# Altium PCB motordriver.PcbDoc (part 2 of 3)
Units mm, origin at the board's own origin, x right, y up, seen from the top; angles counter-clockwise.
Board outline 134.2 x 59.7 mm, 4 copper layers (Top Layer, Mid-Layer 2, Mid-Layer 1, Bottom Layer); 185 components, 161 nets, 637 pads, 1528 vias.
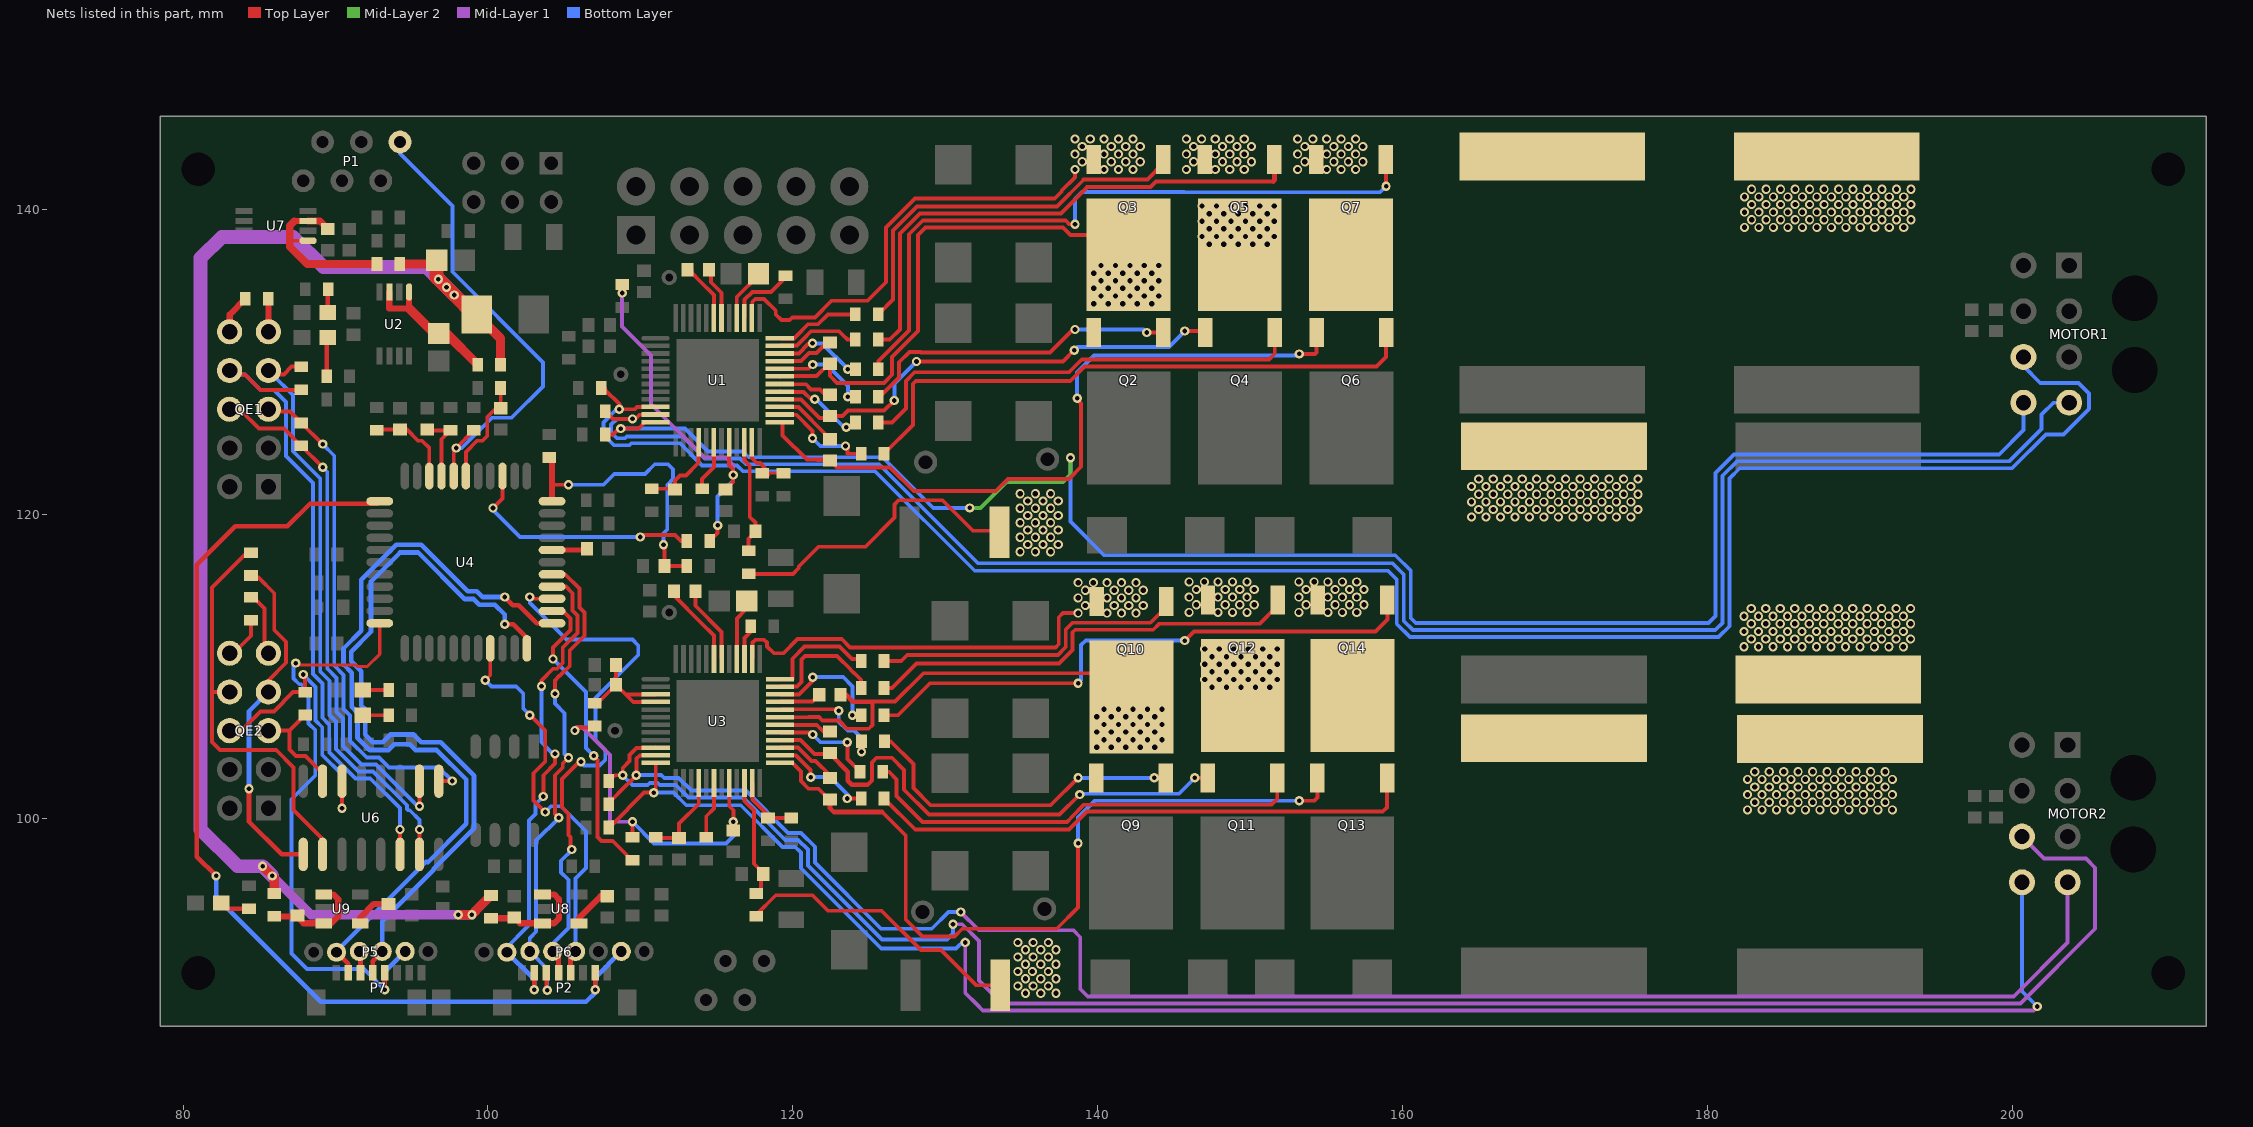
[diagram p4: the nets of this part, all layers, seen from the top]

## Via types
v1: diameter 0.6, hole 0.35, Top Layer to Bottom Layer, tented both sides, 1228 vias
v2: diameter 0.61, hole 0.305, Top Layer to Bottom Layer, tented both sides, 235 vias
v3: diameter 0.66, hole 0.33, Top Layer to Bottom Layer, tented top, 50 vias
v4: diameter 0.813, hole 0.406, Top Layer to Bottom Layer, tented both sides, 6 vias
v5: diameter 0.7, hole 0.4, Top Layer to Bottom Layer, tented both sides, 4 vias
v6: diameter 0.61, hole 0.305, Top Layer to Bottom Layer, 2 vias
v7: diameter 0.7, hole 0.4, Top Layer to Bottom Layer, tented bottom, 2 vias
v8: diameter 0.61/0.61/0.61/0.61 (per signal layer), hole 0.305, Top Layer to Bottom Layer, tented both sides, 1 vias

## Nets (pads, with @x,y where several pads share a name; then routed paths per layer and width w, separated by ;. In a path a pad name is that pad's centre, name@x,y a point inside that pad or via, vN(x,y) a via of type N, cw(c..) or ccw(c..) an arc to the next point about the centre after c; other vN are vias at no path point) (continued)
DR2_V5: C18.2 C19.2 R36.2 U3.3 U3.4 | length 8.2
  Top Layer w0.254: R36.2@107,107.6 107.2,107.6 C18.2@108.4,108.8 ; C19.2@108.4,110.1 C18.2@108.4,108.8 ; 109.1,108.176 U3.3@110.999,108.176 ; U3.4@110.999,107.676 109.524,107.676 C18.2@108.4,108.8
FF_IN: C35.2 R41.1 R42.1 U4.11 | length 19.7
  Top Layer w0.203: U4.11@104.202,120.84 U4.11@104.596,120.84
  Top Layer w0.254: 104.202,121.92 v2(105.283,121.92) ; v2(111.506,117.983) 111.571,117.794 C35.2@111.571,116.586 R42.1@113.042,116.586
  Top Layer w0.406: U4.11@104.202,120.84 104.202,121.92 R41.1@104.202,123.444
  Bottom Layer w0.254: v2(105.283,121.92) 107.569,121.92 108.28,122.631 110.303,122.631 110.938,123.266 111.811,123.266 112.141,122.936 112.141,122.292 111.76,121.911 111.76,118.99 111.506,118.736 111.506,118.237 v2(111.506,117.983)
H1_1: MOTOR1.6 R43.2 U1.10 | length 129.9
  Top Layer w0.254: R43.2@107.569,128.143 107.696,128.143 R43.2@107.684,128.155 ; R43.2@107.569,128.27 R43.2@107.684,128.155 ; R43.2@107.684,128.27 R43.2@107.684,128.155 ; U1.10@110.942,127.048 110.962,127.028 U1.10@110.987,127.028 110.967,127.008 109.779,127.008 109.643,126.873 v2(108.618,126.873) 108.618,127.212 107.684,128.146 R43.2@107.684,128.155
  Bottom Layer w0.254: v2@108.437,126.873 107.569,126.005 107.569,125.201 108.26,124.511 109.271,124.511 109.398,124.638 112.598,124.638 114.046,123.19 116.341,123.19 116.722,122.809 125.391,122.809 131.92,116.28 159.02,116.28 159.6,115.7 159.6,112.8 160.47,111.93 180.704,111.93 181.414,112.64 181.414,122.321 182.093,123 199.947,123 202.17,125.223 203.323,125.223 205,126.9 205,127.9 204.3,128.6 201.8,128.6 200.7,129.7 MOTOR1.6@200.7,130.3
H1_2: MOTOR2.6 R46.2 U3.10 | length 123
  Top Layer w0.254: R46.2@107.926,102.604 R46.2@107.926,102.489 R46.2@107.926,102.731 ; R46.2@107.938,102.616 107.938,102.362 R46.2@107.996,102.42 ; R46.2@107.95,102.489 108.331,102.87 v2(108.839,102.87) 108.839,103.355 109.279,103.794 109.279,104.199 109.736,104.656 110.954,104.656 U3.10@110.974,104.676
  Mid-Layer 1 w0.254: v2@130.489,93.057 v2@130.532,93.1 ; v2(130.5,93.1) v2@130.532,93.1 ; MOTOR2.6@200.6,98.85 202.05,97.4 204.8,97.4 205.4,96.8 205.4,92.8 200.509,87.909 133.691,87.909 132.2,89.4 132.2,92 131.1,93.1 v2@130.532,93.1
  Bottom Layer w0.254: v2(108.839,102.87) 108.839,102.861 109.465,102.235 110.481,102.235 110.608,102.362 111.134,102.362 111.261,102.235 112.312,102.235 113.147,101.4 116.721,101.4 119.493,98.628 120.34,98.628 120.98,97.988 120.98,96.957 125.837,92.1 130.1,92.1 130.489,92.489 v2@130.489,93.057
H2_1: MOTOR1.7 R44.2 U1.11 | length 121
  Top Layer w0.254: R44.2@107.696,126.746 108.204,126.238 v2(109.474,126.238) 109.655,126.238 109.925,126.508 110.967,126.508 U1.11@110.987,126.528 ; U1.11@110.942,126.548 U1.11@110.962,126.528
  Bottom Layer w0.254: v2(109.474,126.238) 108.449,126.238 108.077,125.866 108.077,125.34 108.449,124.968 108.975,124.968 109.102,125.095 112.788,125.095 114.235,123.647 116.53,123.647 116.911,123.266 125.634,123.266 132.13,116.77 159.33,116.77 160.057,116.043 160.057,112.989 160.659,112.387 180.487,112.387 180.957,112.857 180.957,122.511 181.904,123.457 199.757,123.457 201.88,125.58 201.88,126.519 202.662,127.3 MOTOR1.7@203.7,127.3
H2_2: MOTOR2.7 R47.2 U3.11 | length 114
  Top Layer w0.254: R47.2@107.95,100.947 107.95,101.092 109.093,102.235 109.102,102.235 109.728,102.861 v2(109.728,102.87) ; v2@109.744,102.886 109.744,103.963 109.957,104.176 U3.11@110.974,104.176
  Mid-Layer 1 w0.254: v2(131,93.9) 132.2,92.7 138.389,92.7 138.845,92.244 138.845,88.855 139.333,88.367 200.067,88.367 203.6,91.9 MOTOR2.7@203.6,95.85
  Bottom Layer w0.254: v2@109.601,102.87 109.625,102.87 v2@109.65,102.895 ; v2@109.626,102.895 v2@109.65,102.895 ; v2(131,93.9) 130.2,93.9 129.1,92.8 125.784,92.8 121.437,97.146 121.437,98.178 120.53,99.085 119.683,99.085 116.911,101.857 113.336,101.857 112.501,102.692 111.557,102.692 111.354,102.895 v2@109.65,102.895
H3_1: MOTOR1.8 R45.2 U1.12 | length 120.7
  Top Layer w0.254: R45.2@107.938,125.222 108.204,125.222 v2@108.585,125.603 ; v2(108.712,125.603) 109.887,125.603 110.312,126.028 U1.12@110.987,126.028
  Mid-Layer 2 w0.254: v2(131.6,120.4) 132.3,120.4 134,122.1 137.7,122.1 138.2,122.6 v2(138.2,123.7)
  Bottom Layer w0.254: v2(108.712,125.603) 112.926,125.603 114.425,124.104 116.72,124.104 117.101,123.723 125.877,123.723 129.2,120.4 v2(131.6,120.4) ; v2(138.2,123.7) 138.2,119.5 140.4,117.3 159.5,117.3 160.514,116.286 160.514,113.179 160.849,112.845 180.045,112.845 180.5,113.3 180.5,122.7 181.714,123.914 199.114,123.914 200.7,125.5 MOTOR1.8@200.7,127.3
H3_2: MOTOR2.8 R48.2 U3.12 | length 114.6
  Top Layer w0.254: R48.2@107.926,99.698 R48.2@107.926,99.441 R48.2@108.137,99.441 ; R48.2@108.125,99.616 110.236,101.727 v2(110.871,101.727) 110.999,101.855 U3.12@110.999,103.676
  Mid-Layer 1 w0.254: v2@131.3,92.1 131.3,88.6 132.03,87.87 132.448,87.452 201.352,87.452 v2(201.6,87.7)
  Bottom Layer w0.254: v2(110.871,101.727) 112.173,101.727 113,100.9 116.575,100.9 119.304,98.171 120.151,98.171 120.523,97.799 120.523,96.768 125.791,91.5 130.7,91.5 v2@131.3,92.1 ; MOTOR2.8@200.6,95.85 200.6,88.7 v2@201.608,87.692
  other v2: 131.3,91.9
IN_A: QE1.6 R56.1 U6.2 | length 35.1
  Top Layer w0.254: QE1.6@83.058,126.619 83.312,126.873 83.71,126.873 84.98,125.603 86.626,125.603 R56.1@87.757,124.472 v2(89.154,123.075) ; v2(95.504,100.838) U6.2@95.504,102.476
  Bottom Layer w0.254: v2(89.154,123.075) 89.459,122.77 89.459,122.682 89.459,109.871 90.074,109.255 90.074,107.013 ; 90.074,107.203 90.074,107.013 ; v2(95.504,100.838) 95.377,100.838 95.148,101.067 95.148,101.09 92.657,103.581 91.694,103.581 90.5,104.775 90.5,106.587 90.074,107.013
IN_B: QE1.8 R57.1 U6.14 | length 43.1
  Top Layer w0.254: QE1.8@83.058,129.159 84.074,129.159 85.09,128.143 87.745,128.143 R57.1@87.757,128.155 ; U6.14@94.234,97.676 v2(94.234,99.314)
  Bottom Layer w0.254: QE1.8@83.058,129.159 84.074,129.159 85.09,128.143 85.962,128.143 86.753,127.351 86.753,123.813 88.519,122.047 88.519,109.517 89.154,108.882 89.154,106.64 ; 89.154,106.83 89.154,106.64 ; v2(94.234,99.314) 94.234,100.711 92.278,102.667 91.315,102.667 89.586,104.396 89.586,106.209 89.154,106.64
IN_C: QE2.6 R58.1 U6.6 | length 18.8
  Top Layer w0.254: QE2.6@83.058,105.791 83.82,105.791 85.09,107.061 85.962,107.061 87.22,108.319 R58.1@88.011,108.319 88.011,109.347 v2(87.884,109.474) ; v2(90.424,100.711) U6.6@90.424,102.476
  Bottom Layer w0.254: v2(87.884,109.474) 88.697,108.661 88.697,106.451 89.129,106.019 89.129,104.207 90.424,102.911 v2(90.424,100.711)
IN_D: QE2.8 R59.1 U6.10 | length 27.4
  Top Layer w0.254: QE2.8@83.058,108.077 82.804,108.331 81.903,108.331 ; R59.1@84.455,117.336 84.062,117.336 81.903,115.177 81.903,108.331 ; U6.10@89.154,97.676 89.154,98.679 87.249,100.584 87.249,103.378 86.111,104.516 82.428,104.516 81.903,105.041 81.903,108.331
IN_NA: QE1.5 R56.2 U6.1 | length 33.4
  Top Layer w0.254: QE1.5@85.598,126.619 85.713,126.734 87.007,126.734 R56.2@87.763,125.978 ; R56.2@87.757,125.972 89.142,124.587 v2(89.154,124.587) ; U6.1@96.787,102.489 v2(97.663,102.489)
  Bottom Layer w0.254: v2(89.154,124.587) 89.916,123.825 89.916,110.06 90.531,109.445 90.531,107.203 90.957,106.777 90.957,105.127 92.046,104.038 92.846,104.038 93.507,103.378 96.774,103.378 v2(97.663,102.489)
IN_NB: QE1.7 R57.2 U6.15 | length 38.7
  Top Layer w0.254: QE1.7@85.598,129.159 86.614,129.159 87.122,129.667 87.745,129.667 R57.2@87.757,129.655 ; U6.15@95.504,97.676 v2(95.504,99.314)
  Bottom Layer w0.254: QE1.7@85.598,129.159 85.852,129.159 87.21,127.801 87.21,124.118 89.002,122.326 89.002,109.681 89.617,109.066 89.617,106.873 89.611,106.867 89.611,106.83 90.043,106.398 90.043,104.586 91.505,103.124 92.468,103.124 94.691,100.9 94.691,100.635 94.751,100.575 94.869,100.575 95.504,99.94 v2(95.504,99.314)
IN_NC: QE2.5 R58.2 U6.7 | length 7.4
  Top Layer w0.254: QE2.5@85.598,105.791 86.983,105.791 ; R58.2@88.011,106.819 86.983,105.791 ; U6.7@89.154,102.476 89.154,102.997 88.029,104.122 87.409,104.122 86.983,104.548 86.983,105.791
IN_ND: QE2.7 R59.2 U6.9 | length 23
  Top Layer w0.254: R59.2@84.455,115.836 84.951,115.836 85.979,114.808 85.979,112.395 86.753,111.621 86.753,110.248 85.598,109.093 QE2.7@85.598,108.077
  Top Layer w0.305: v2(84.328,101.981) 84.328,99.822 86.474,97.676 U6.9@87.884,97.676
  Bottom Layer w0.305: v2(84.328,101.981) 84.328,107.061 QE2.7@85.598,108.331
M\C\L\R\: P1.1 R29.1 U4.18 | length 30.8
  Top Layer w0.254: U4.18@97.752,122.49 v2@97.752,124.168 ; v2(97.917,124.333) R29.1@99.06,125.488
  Bottom Layer w0.254: P1.1@94.234,144.653 94.234,143.637 97.536,140.335 97.545,140.335 97.663,140.217 97.663,135.89 103.607,129.946 103.607,128.372 101.549,126.314 100.268,126.314 99.125,125.171 99.116,125.171 98.277,124.333 v2(97.917,124.333)
NetC1_1: C1.1 U1.42 | length 3.3
  Top Layer w0.254: C1.1@114.619,135.89 114.619,135.202 115.312,134.509 U1.42@115.312,132.878
NetC1_2: C1.2 U1.43 | length 3.9
  Top Layer w0.254: C1.2@113.219,136.144 113.346,136.017 113.346,135.828 113.919,135.255 114.812,134.362 U1.43@114.812,132.878
NetC2_1: C2.1 U1.40 | length 3.8
  Top Layer w0.254: U1.40@116.312,132.878 116.312,134.231 117.794,135.713 C2.1@117.794,136.017
NetC5_1: C5.1 U1.33 | length 4.4
  Top Layer w0.203: C5.1@122.62,131.256 C5.1@122.682,131.256
  Top Layer w0.254: U1.33@118.9,130.028 120.534,130.028 121.062,130.556 121.548,130.556 122.231,131.239 C5.1@122.665,131.239 ; C5.1@122.682,131.173 C5.1@122.682,131.256
NetC5_2: C5.2 L1.1 Q2.3 Q3.4 U1.31 | length 33.5
  Top Layer w0.254: U1.31@119.162,129.028 119.182,129.048 121.555,129.048 C5.2@122.428,129.921 ; C5.2@122.428,129.856 122.428,129.072 122.9,128.6 125.967,128.6 126.498,129.131 126.498,130.298 128.2,132 128.2,138.3 128.7,138.8 137.7,138.8 138.2,138.3 140.7,138.3 Q3.4@142,137
  Top Layer w0.305: C5.2@122.428,129.921 C5.2@122.428,129.928
  other v1: 164.5,119.8 165.45,119.8 166.4,119.8 167.35,119.8 168.3,119.8 169.25,119.8 170.2,119.8 171.15,119.8 172.1,119.8 173.05,119.8 174,119.8 174.95,119.8 164.975,120.3 165.925,120.3 166.875,120.3 167.825,120.3 168.775,120.3 169.725,120.3 170.675,120.3 171.625,120.3 172.575,120.3 173.525,120.3 174.475,120.3 175.425,120.3 164.5,120.8 165.45,120.8 166.4,120.8 167.35,120.8 168.3,120.8 169.25,120.8 170.2,120.8 171.15,120.8 172.1,120.8 173.05,120.8 174,120.8 174.95,120.8 164.975,121.3 165.925,121.3 166.875,121.3 167.825,121.3 168.775,121.3 169.725,121.3 170.675,121.3 171.625,121.3 172.575,121.3 173.525,121.3 174.475,121.3 175.425,121.3 164.5,121.8 165.45,121.8 166.4,121.8 167.35,121.8 168.3,121.8 169.25,121.8 170.2,121.8 171.15,121.8 172.1,121.8 173.05,121.8 174,121.8 174.95,121.8 164.975,122.3 165.925,122.3 166.875,122.3 167.825,122.3 168.775,122.3 169.725,122.3 170.675,122.3 171.625,122.3 172.575,122.3 173.525,122.3 174.475,122.3 175.425,122.3 139.725,133.8 140.675,133.8 141.625,133.8 142.575,133.8 143.525,133.8 140.2,134.3 141.15,134.3 142.1,134.3 143.05,134.3 144,134.3 139.725,134.8 140.675,134.8 141.625,134.8 142.575,134.8 143.525,134.8 140.2,135.3 141.15,135.3 142.1,135.3 143.05,135.3 144,135.3 139.725,135.8 140.675,135.8 141.625,135.8 142.575,135.8 143.525,135.8 140.2,136.3 141.15,136.3 142.1,136.3 143.05,136.3 144,136.3
NetC6_1: C6.1 U1.30 | length 4.2
  Top Layer w0.203: C6.1@122.512,127.784 C6.1@122.682,127.954
  Top Layer w0.254: U1.30@119.182,128.548 119.162,128.528 119.182,128.508 120.847,128.508 121.192,128.163 121.773,128.163 122.289,127.647 122.62,127.647 C6.1@122.62,127.762
NetC6_2: C6.2 L2.1 Q4.3 Q5.4 U1.28 | length 31.5
  Top Layer w0.254: U1.28@119.182,127.508 120.523,127.508 121.731,126.3 C6.2@122.62,126.3 ; C6.2@122.428,126.427 123.26,126.427 123.613,126.78 125.98,126.78 v2(126.65,127.45) ; v2(128.1,130) 137.7,130 v2(138.45,130.75) ; v2(145.7,132) 146.94,132 Q4.3@147.04,131.9
  Bottom Layer w0.254: v2(126.65,127.45) 126.65,128.55 v2(128.1,130) ; v2(138.45,130.75) 138.657,130.957 144.657,130.957 v2(145.7,132)
  other v1: 147.3,137.7 148.25,137.7 149.2,137.7 150.15,137.7 151.1,137.7 146.825,138.2 147.775,138.2 148.725,138.2 149.675,138.2 150.625,138.2 151.575,138.2 147.3,138.7 148.25,138.7 149.2,138.7 150.15,138.7 151.1,138.7 182.4,138.8 183.35,138.8 184.3,138.8 185.25,138.8 186.2,138.8 187.15,138.8 188.1,138.8 189.05,138.8 190,138.8 190.95,138.8 191.9,138.8 192.85,138.8 146.825,139.2 147.775,139.2 148.725,139.2 149.675,139.2 150.625,139.2 151.575,139.2 182.875,139.3 183.825,139.3 184.775,139.3 185.725,139.3 186.675,139.3 187.625,139.3 188.575,139.3 189.525,139.3 190.475,139.3 191.425,139.3 192.375,139.3 193.325,139.3 147.3,139.7 148.25,139.7 149.2,139.7 150.15,139.7 151.1,139.7 182.4,139.8 183.35,139.8 184.3,139.8 185.25,139.8 186.2,139.8 187.15,139.8 188.1,139.8 189.05,139.8 190,139.8 190.95,139.8 191.9,139.8 192.85,139.8 146.825,140.2 147.775,140.2 148.725,140.2 149.675,140.2 150.625,140.2 151.575,140.2 182.875,140.3 183.825,140.3 184.775,140.3 185.725,140.3 186.675,140.3 187.625,140.3 188.575,140.3 189.525,140.3 190.475,140.3 191.425,140.3 192.375,140.3 193.325,140.3 182.4,140.8 183.35,140.8 184.3,140.8 185.25,140.8 186.2,140.8 187.15,140.8 188.1,140.8 189.05,140.8 190,140.8 190.95,140.8 191.9,140.8 192.85,140.8 182.875,141.3 183.825,141.3 184.775,141.3 185.725,141.3 186.675,141.3 187.625,141.3 188.575,141.3 189.525,141.3 190.475,141.3 191.425,141.3 192.375,141.3 193.325,141.3
NetC8_1: C8.1 U1.27 | length 4.3
  Top Layer w0.254: U1.27@119.162,127.028 119.182,127.008 120.367,127.008 122.174,125.201 C8.1@122.174,124.652
NetC8_2: C8.2 L3.1 Q6.3 Q7.4 U1.25 | length 46.7
  Top Layer w0.254: U1.25@119.137,126.028 119.326,126.028 119.326,125.16 120.916,123.571 121.613,123.571 ; C8.2@122.363,123.571 C8.2@122.428,123.506 122.871,123.063 126.363,123.063 127.926,121.5 133.3,121.5 134.1,122.3 138.1,122.3 138.9,123.1 138.9,127.24 v2@138.64,127.5 ; v2@153.14,130.4 153.24,130.5 154.24,130.5 154.34,130.6 Q6.3@154.34,131.9
  Top Layer w0.305: 121.613,123.571 C8.2@122.363,123.571
  Bottom Layer w0.254: v2(138.64,127.6) 138.64,129.3 139.74,130.4 153.1,130.4 v2(153.2,130.5)
NetC11_2: C11.2 R11.2 U1.16 | length 5.5
  Top Layer w0.254: R11.2@110.744,121.654 112.218,121.654 C11.2@112.268,121.604 112.268,122.197 112.604,122.533 112.978,122.533 113.707,123.262 113.707,123.264 113.812,123.369 U1.16@113.812,124.678
NetC12_2: C12.2 R14.2 R34.1 U1.20 | length 24.5
  Top Layer w0.254: R14.2@114.554,118.237 115.062,118.745 v2(115.062,119.253) ; U1.20@115.812,124.703 115.812,123.202 116.078,122.936 v2(116.078,122.555) 116.078,122.112 C12.2@115.57,121.604 C12.2@115.824,121.858
  Mid-Layer 1 w0.254: v2(108.8,134.5) 108.8,132.3 110.7,130.4 110.7,127.2 114.2,123.7 115.6,123.7 116.078,123.222 v2(116.078,122.555)
  Bottom Layer w0.254: v2(115.062,119.253) 115.062,121.158 116.078,122.174 v2(116.078,122.555)
NetC14_2: C14.2 D1.K F1.1 F2.1 F6.1 F7.1 | length 92.4
  Top Layer w0.61: v2(85.217,96.901) 85.979,96.139 F7.1@85.979,95.111 ; F2.1@94.222,136.398 96.382,136.398 C14.2@96.636,136.652 ; v2(98.044,93.726) v2(98.945,93.726) 99.245,94.026 99.245,94.044 100.185,94.984 F6.1@100.203,94.984 ; D1.K@99.247,133.096 100.826,131.517 F1.1@100.826,129.794
  Top Layer w0.914: C14.2@96.636,136.652 96.636,135.52 v2(96.75,135.406) v2(97.282,134.874) v2(97.79,134.366) 99.06,133.096 D1.K@99.247,133.096
  Mid-Layer 1 w0.61: v2(85.852,96.266) 88.392,93.726 v2(98.945,93.726)
  Mid-Layer 1 w0.914: v2(85.852,96.266) v2(85.217,96.901) 83.566,96.901 81.153,99.314 81.153,136.779 82.55,138.176 87.224,138.176 89.2,136.2 95.956,136.2 v2(96.75,135.406) v2(97.282,134.874) v2(97.79,134.366)
NetC15_2: C15.2 F1.2 U2.1 U2.3 | length 9.5
  Top Layer w0.406: U2.3@93.528,134.561 93.528,133.477 94.828,133.477 U2.1@94.828,134.561
  Top Layer w0.61: 94.828,133.477 96.468,131.837 C15.2@96.774,131.837 97.283,131.837 F1.2@99.326,129.794
NetC16_1: C16.1 U3.42 | length 5.1
  Top Layer w0.254: C16.1@113.603,114.935 113.603,113.981 115.324,112.26 115.324,110.526 U3.42@115.31,110.54
NetC16_2: C16.2 U3.43 | length 5.2
  Top Layer w0.254: C16.2@112.203,114.646 113.979,112.87 113.979,112.866 114.824,112.022 U3.43@114.824,110.526
NetC17_1: C17.1 U3.40 | length 3.9
  Top Layer w0.254: U3.40@116.324,110.526 116.324,113.149 116.87,113.695 C17.1@116.87,114.22
NetC20_1: C20.1 U3.33 | length 2.7
  Top Layer w0.254: U3.33@119.194,107.696 121.285,107.696 C20.1@121.728,108.139
NetC20_2: C20.2 L4.1 Q9.3 Q10.4 U3.31 | length 28.4
  Top Layer w0.254: U3.31@119.174,106.676 121.039,106.676 121.043,106.68 121.699,106.68 121.919,106.459 123.015,106.459 123.556,105.918 124.968,105.918 125.222,106.172 125.222,107.398 125.222,107.569 125.095,107.696 126.696,107.696 128.56,109.56 140.54,109.56 Q10.4@142.2,107.9
  Top Layer w0.305: C20.2@123.488,108.139 123.931,107.696 125.095,107.696
  other v1: 182.6,100.6 183.55,100.6 184.5,100.6 185.45,100.6 186.4,100.6 187.35,100.6 188.3,100.6 189.25,100.6 190.2,100.6 191.15,100.6 192.1,100.6 183.075,101.1 184.025,101.1 184.975,101.1 185.925,101.1 186.875,101.1 187.825,101.1 188.775,101.1 189.725,101.1 190.675,101.1 191.625,101.1 182.6,101.6 183.55,101.6 184.5,101.6 185.45,101.6 186.4,101.6 187.35,101.6 188.3,101.6 189.25,101.6 190.2,101.6 191.15,101.6 192.1,101.6 183.075,102.1 184.025,102.1 184.975,102.1 185.925,102.1 186.875,102.1 187.825,102.1 188.775,102.1 189.725,102.1 190.675,102.1 191.625,102.1 182.6,102.6 183.55,102.6 184.5,102.6 185.45,102.6 186.4,102.6 187.35,102.6 188.3,102.6 189.25,102.6 190.2,102.6 191.15,102.6 192.1,102.6 183.075,103.1 184.025,103.1 184.975,103.1 185.925,103.1 186.875,103.1 187.825,103.1 188.775,103.1 189.725,103.1 190.675,103.1 191.625,103.1 139.925,104.7 140.875,104.7 141.825,104.7 142.775,104.7 143.725,104.7 140.4,105.2 141.35,105.2 142.3,105.2 143.25,105.2 144.2,105.2 139.925,105.7 140.875,105.7 141.825,105.7 142.775,105.7 143.725,105.7 140.4,106.2 141.35,106.2 142.3,106.2 143.25,106.2 144.2,106.2 139.925,106.7 140.875,106.7 141.825,106.7 142.775,106.7 143.725,106.7 140.4,107.2 141.35,107.2 142.3,107.2 143.25,107.2 144.2,107.2
NetC21_1: C21.1 U3.30 | length 3.5
  Top Layer w0.254: U3.30@119.153,106.172 121.56,106.172 122.003,105.729 C21.1@122.428,105.729
NetC21_2: C21.2 L5.1 Q11.3 Q12.4 U3.28 | length 34.2
  Top Layer w0.254: U3.28@119.174,105.176 120.503,105.176 121.412,104.267 122.366,104.267 C21.2@122.428,104.329 ; 124.886,102.235 125.178,102.527 125.178,103.715 125.476,104.013 126.492,104.013 127.283,103.222 127.283,101.917 128.917,100.283 137.483,100.283 v2@138.712,101.512 ; v2(146.352,102.7) Q11.3@147.2,102.7
  Top Layer w0.305: C21.2@122.428,104.267 123.6,103.095 123.6,102.5 123.865,102.235 124.886,102.235
  Bottom Layer w0.254: v2(138.8,101.6) 138.857,101.657 145.309,101.657 v2(146.352,102.7)
  other v1: 147.48,108.65 148.43,108.65 149.38,108.65 150.33,108.65 151.28,108.65 147.005,109.15 147.955,109.15 148.905,109.15 149.855,109.15 150.805,109.15 151.755,109.15 147.48,109.65 148.43,109.65 149.38,109.65 150.33,109.65 151.28,109.65 147.005,110.15 147.955,110.15 148.905,110.15 149.855,110.15 150.805,110.15 151.755,110.15 147.48,110.65 148.43,110.65 149.38,110.65 150.33,110.65 151.28,110.65 147.005,111.15 147.955,111.15 148.905,111.15 149.855,111.15 150.805,111.15 151.755,111.15 182.375,111.3 183.325,111.3 184.275,111.3 185.225,111.3 186.175,111.3 187.125,111.3 188.075,111.3 189.025,111.3 189.975,111.3 190.925,111.3 191.875,111.3 192.825,111.3 182.85,111.8 183.8,111.8 184.75,111.8 185.7,111.8 186.65,111.8 187.6,111.8 188.55,111.8 189.5,111.8 190.45,111.8 191.4,111.8 192.35,111.8 193.3,111.8 182.375,112.3 183.325,112.3 184.275,112.3 185.225,112.3 186.175,112.3 187.125,112.3 188.075,112.3 189.025,112.3 189.975,112.3 190.925,112.3 191.875,112.3 192.825,112.3 182.85,112.8 183.8,112.8 184.75,112.8 185.7,112.8 186.65,112.8 187.6,112.8 188.55,112.8 189.5,112.8 190.45,112.8 191.4,112.8 192.35,112.8 193.3,112.8 182.375,113.3 183.325,113.3 184.275,113.3 185.225,113.3 186.175,113.3 187.125,113.3 188.075,113.3 189.025,113.3 189.975,113.3 190.925,113.3 191.875,113.3 192.825,113.3 182.85,113.8 183.8,113.8 184.75,113.8 185.7,113.8 186.65,113.8 187.6,113.8 188.55,113.8 189.5,113.8 190.45,113.8 191.4,113.8 192.35,113.8 193.3,113.8
NetC23_1: C23.1 U3.27 | length 4.2
  Top Layer w0.254: U3.27@119.174,104.676 120.338,104.676 120.98,104.033 120.999,104.033 121.223,103.81 121.488,103.81 122.428,102.87 C23.1@122.428,102.681
NetC23_2: C23.2 L6.1 Q13.3 Q14.4 U3.25 | length 52.2
  Top Layer w0.254: U3.25@119.174,103.676 119.971,103.676 120.523,103.124 120.523,102.48 121.022,101.981 121.666,101.981 C23.2@122.428,101.219 ; 125.857,100.457 127.4,98.914 127.4,93.4 128.5,92.3 130.6,92.3 131.1,92.8 137.3,92.8 138.7,94.2 138.7,98.3 v2@138.6,98.4 ; v2(153.2,101.2) 154.2,101.2 154.4,101.4 Q13.3@154.4,102.7
  Top Layer w0.305: C23.2@122.428,101.219 122.428,100.711 122.682,100.457 125.857,100.457
  Bottom Layer w0.254: v2(138.7,98.4) 138.7,100.1 139.8,101.2 v2@153,101.2
NetC26_2: C26.2 R25.2 U3.16 | length 5.6
  Top Layer w0.254: R25.2@111.06,98.744 C26.2@112.534,98.744 112.534,99.695 113.824,100.985 U3.16@113.824,102.326
NetC27_2: C27.2 R28.2 R36.1 U3.20 | length 23
  Top Layer w0.254: v2(105.7,105.8) 105.7,105.9 105.8,106 106.9,106 R36.1@107,106.1 ; R28.2@109.474,98.794 v2(109.474,99.822) ; U3.20@115.824,102.326 115.824,100.838 116.09,100.572 v2(116.09,99.822) C27.2@116.084,99.314
  Mid-Layer 1 w0.254: v2(105.7,105.8) 105.7,105.9 105.8,106 106.2,106 108,104.2 108,99.822 v2(109.474,99.822)
  Bottom Layer w0.254: v2(109.474,99.822) 110.896,98.4 115.6,98.4 116.09,98.89 v2(116.09,99.822)
NetC28_2: C28.2 U4.7 | length 2.4
  Top Layer w0.305: U4.7@104.202,117.64 106.488,117.64 C28.2@106.488,117.729
NetC33_2: C33.2 F4.2 U4.17 | length 7
  Top Layer w0.254: U4.17@98.611,122.549 U4.17@98.552,122.49 98.552,124.079 99.281,124.808 99.647,124.808 99.949,125.11 99.949,126.365 100.838,127.254 F4.2@100.838,128.27
NetC38_2: C38.2 R30.1 U4.19 | length 4.8
  Top Layer w0.254: C38.2@96.012,125.488 96.774,125.488 R30.1@97.536,125.488 96.952,124.904 U4.19@96.952,122.49
NetC39_2: C39.2 R49.1 U4.20 | length 5.5
  Top Layer w0.254: R49.1@92.71,125.488 92.76,125.538 93.472,125.538 C39.2@94.234,125.538 ; C39.2@94.488,125.538 94.68,125.538 95.41,124.808 95.664,124.808 96.152,124.32 U4.20@96.152,122.49
NetC44_2: C44.2 F2.2 U7.1 U7.3 | length 11.6
  Top Layer w0.25: 86.995,137.9 87.02,137.925 U7.1@88.2,137.925
  Top Layer w0.4: 87.3,139.2 87.325,139.225 U7.3@88.2,139.225
  Top Layer w0.45: U7.3@88.2,139.222 88.978,139.222 C44.2@89.5,138.7
  Top Layer w0.5: 87.3,139.2 86.995,138.895 86.995,137.9 86.995,137.541 88.138,136.398 F2.2@92.722,136.398
NetC45_2: C45.2 R12.1 U1.22 | length 7.7
  Top Layer w0.254: U1.22@116.812,124.703 116.812,123.514 117.17,123.156 117.17,119.812 117.54,119.442 117.54,118.81 117.094,118.364 R12.1@117.094,117.463
NetC46_2: C46.2 R26.1 U3.22 | length 8
  Top Layer w0.254: U3.22@116.824,102.351 116.824,101.162 117.436,100.55 117.436,97.067 118.079,96.424 117.915,96.26 117.915,95.424 R26.1@117.602,95.111
NetC47_2: C47.2 F6.2 U8.1 U8.3 | length 7.2
  Top Layer w0.406: F6.2@100.203,93.484 C47.2@101.677,93.484 ; C47.2@101.727,93.534 102.104,93.157 U8.3@103.575,93.157 104.333,93.157 104.648,93.472 104.648,94.742 104.333,95.057 U8.1@103.575,95.057
NetC49_2: C49.2 U8.4 | length 2.8
  Top Layer w0.406: U8.4@105.975,93.157 105.975,93.529 107.38,94.934 C49.2@107.823,94.934
NetC50_2: C50.2 F7.2 U9.1 U9.3 | length 6.8
  Top Layer w0.406: F7.2@85.979,93.611 87.453,93.611 87.907,93.157 89.724,93.157 90.18,93.614 90.18,94.732 89.855,95.057 U9.1@89.224,95.057
NetC52_2: C52.2 U9.4 | length 2.6
  Top Layer w0.406: U9.4@91.624,93.157 91.624,93.529 92.521,94.426 C52.2@93.472,94.426
NetD2_1: D2.1 R65.1 | length 1.5
  Top Layer w0.305: D2.1@89.496,133.223 89.496,134.72 R65.1@89.523,134.747
NetD3_1: D3.1 R66.1 | length 2.6
  Top Layer w0.305: R66.1@89.42,129.032 89.42,131.496 D3.1@89.496,131.572
NetD4_1: D4.1 R37.2 | length 1.7
  Top Layer w0.254: D4.1@91.782,108.458 R37.2@93.484,108.458
NetD5_1: D5.1 R38.2 | length 1.7
  Top Layer w0.254: D5.1@91.782,106.807 R38.2@93.484,106.807
NetD6_1: D6.1 R63.1 | length 2
  Top Layer w0.305: D6.1@82.511,94.488 82.88,94.119 R63.1@84.328,94.119
NetP2_2: P2.2 P6.2 U4.4 | length 32.4
  Top Layer w0.254: v2(103.505,108.712) 103.505,109.093 104.267,109.855 104.53,109.855 104.902,110.227 104.902,111.24 105.867,112.206 105.867,113.346 105.537,113.677 105.537,114.808 105.105,115.24 U4.4@104.202,115.24 ; v2(103.632,101.473) 103.632,102.87 104.394,103.632 v2(104.394,104.267)
  Top Layer w0.305: v2(103.029,88.805) P2.2@103.029,89.789
  Bottom Layer w0.254: P6.2@101.079,91.427 102.692,93.04 102.692,99.889 103.124,100.321 103.124,100.965 v2(103.632,101.473) ; v2(103.505,108.712) 103.505,105.029 104.267,104.267 v2(104.394,104.267)
  Bottom Layer w0.305: P6.2@101.079,91.427 103.029,89.477 v2(103.029,88.805)
NetP2_3: P2.3 P6.3 U4.5 | length 33.5
  Top Layer w0.254: P2.3@103.829,89.916 103.829,88.83 v2(103.886,88.773) ; v2(104.394,108.204) 104.394,109.093 104.699,109.398 ; v2(104.648,100.076) 104.394,100.33 104.394,102.87 104.902,103.378 104.902,103.632 v2(105.283,104.013) ; 104.719,109.398 105.359,110.038 105.359,111.051 106.324,112.016 106.324,113.536 105.994,113.866 105.994,115.113 105.067,116.04 U4.5@104.202,116.04 U4.5@104.94,116.04
  Top Layer w0.305: P6.3@102.743,91.313 P6.3@102.758,91.313
  Bottom Layer w0.254: v2(103.886,88.773) 103.886,90.17 P6.3@102.743,91.313 102.743,92.202 103.149,92.608 103.149,98.577 v2(104.648,100.076) ; v2(104.394,108.204) 104.394,107.569 105.029,106.934 105.029,104.267 v2(105.283,104.013)
NetP2_4: P2.4 P6.4 U4.3 | length 36.8
  Top Layer w0.254: v2(102.743,114.554) 102.857,114.44 U4.3@104.202,114.44 ; v2@105.41,98 105.41,98.806 105.283,98.933 105.283,100.339 104.851,100.771 104.851,102.616 106.045,103.81 v2(106.096,103.759)
  Top Layer w0.305: P6.4@104.243,91.313 104.629,90.927 P2.4@104.629,89.916
  Bottom Layer w0.254: v2(102.743,114.554) 102.743,114.173 105.156,111.76 109.483,111.76 109.855,111.388 109.855,110.744 107.044,107.933 107.044,105.162 107.69,104.515 107.69,103.88 107.315,103.505 106.299,103.505 106.096,103.708 v2(106.096,103.759) ; P6.4@104.243,91.313 104.243,91.797 105.286,92.84 105.286,96.014 104.8,96.5 104.8,97.263 v2@105.537,98
  other v2: 105.5,98
NetP2_5: P2.5 P6.5 U4.41 | length 27.6
  Top Layer w0.254: v2(99.822,109.093) 100.152,109.423 U4.41@100.152,111.19 ; v2(102.743,106.807) 103.759,105.791 103.759,103.759 102.997,102.997 102.997,101.21 103.75,100.457 v2(103.759,100.457)
  Top Layer w0.305: P2.5@105.429,89.916 105.41,89.935 105.41,90.98 P6.5@105.743,91.313
  Bottom Layer w0.254: v2(99.822,109.093) 100.228,108.687 101.853,108.687 102.311,108.228 102.311,107.239 v2(102.743,106.807) ; v2(103.759,100.457) 104.14,100.838 104.784,100.838 106.426,99.196 106.426,96.774 105.743,96.091 P6.5@105.743,91.059
NetP2_7: P2.7 P6.7 U4.23 | length 68.4
  Top Layer w0.305: v2(82.169,96.266) 80.899,97.536 80.899,116.669 83.419,119.189 86.848,119.189 88.329,120.671 92.733,120.671 U4.23@92.902,120.84 ; v2(107.029,88.805) P2.7@107.029,89.789
  Bottom Layer w0.305: v2(82.169,96.266) 82.169,94.869 89.027,88.011 106.426,88.011 107.029,88.614 v2(107.029,88.805) 107.029,89.599 P6.7@108.743,91.313
NetP5_2: P5.2 P7.2 U4.1 | length 52.3
  Top Layer w0.305: P5.2@90.067,91.263 90.837,90.493 P7.2@90.837,89.916 ; v2(101.092,114.554) 101.625,114.021 102.006,114.021 103.187,112.84 U4.1@104.202,112.84
  Bottom Layer w0.305: P5.2@90.067,91.009 90.067,91.337 95.91,97.18 96.08,97.18 98.577,99.677 98.577,102.591 96.647,104.521 95.25,104.521 94.869,104.902 93.853,104.902 93.472,104.521 92.246,104.521 91.44,105.327 91.44,106.977 91.059,107.358 91.059,109.6 90.526,110.133 90.526,111.183 91.694,112.351 91.694,115.697 93.98,117.983 95.631,117.983 98.683,114.931 99.274,114.931 99.651,114.554 v2(101.092,114.554)
NetP5_3: P5.3 P7.3 | length 1.6
  Top Layer w0.305: P5.3@91.567,91.313 91.637,91.243 P7.3@91.637,89.789
NetP5_4: P5.4 P7.4 U4.44 | length 50
  Top Layer w0.305: P7.4@92.437,89.916 92.437,90.683 P5.4@93.067,91.313 ; v2(101.092,112.776) 101.658,112.776 102.552,111.882 U4.44@102.552,111.19
  Bottom Layer w0.305: P5.4@93.067,91.059 93.067,93.291 96.449,96.672 96.449,96.749 99.085,99.385 99.085,102.845 96.901,105.029 95.631,105.029 95.123,105.537 93.599,105.537 93.091,105.029 92.456,105.029 91.948,105.537 91.948,107.187 91.694,107.441 91.694,109.683 91.034,110.343 91.034,110.973 92.329,112.268 92.329,115.57 94.234,117.475 95.421,117.475 98.472,114.423 99.064,114.423 99.441,114.046 100.457,114.046 101.092,113.411 v2(101.092,112.776)
NetP5_5: P5.5 P7.5 U4.33 | length 39.4
  Top Layer w0.203: v2@87.503,110.109 91.34,110.109 91.441,110.007 92.1,110.007 92.902,110.809 U4.33@92.902,112.84
  Top Layer w0.305: v2(93.237,88.792) P7.5@93.237,89.789
  Bottom Layer w0.254: v2(87.388,110.224) 87.249,110.085 87.249,109.211 87.621,108.839 87.757,108.839 88.24,108.356 88.24,106.262 88.671,105.83 88.671,102.845 87.122,101.295 87.122,91.186 88.138,90.17 91.859,90.17 v2(93.237,88.792)
  Bottom Layer w0.305: v2(93.237,88.792) 93.237,89.983 P5.5@94.567,91.313
NetQ2_1: Q2.1 R1.2 | length 21.2
  Top Layer w0.254: R1.2@125.6,127.7 125.714,127.7 126.955,128.942 126.955,129.955 127.635,130.635 128.363,130.635 128.398,130.6 136.867,130.6 138.367,132.1 v2(138.5,132.1) ; v2(143.2,131.9) Q2.1@144.3,131.9
  Bottom Layer w0.254: v2(138.5,132.1) 143,132.1 v2(143.2,131.9)
NetQ3_1: Q3.1 R2.2 | length 25.7
  Top Layer w0.254: R2.2@125.591,133.096 126.557,134.062 126.557,138.597 128.132,140.172 137.321,140.172 139.069,141.92 ; 139.044,141.944 143.247,141.944 Q3.1@144.28,142.977
  Top Layer w0.305: Q3.1@144.28,142.977 Q3.1@144.28,143.25
NetQ3_3: Q3.3 Q5.3 Q7.3 R12.2 R13.2 U1.38 | length 49.4
  Top Layer w0.254: R12.2@117.094,115.951 117.221,116.078 119.995,116.078 120.38,116.463 120.38,116.57 121.666,117.856 124.756,117.856 126.67,119.77 126.67,120.637 126.933,120.9 129.8,120.9 131.8,118.9 R13.2@133.55,118.9 ; U1.38@117.332,132.873 117.332,133.915 117.525,134.108 118.099,134.108 118.872,133.335 118.872,133.087 119.244,132.715 119.77,132.715 119.956,132.901 121.454,132.901 122.538,133.985 124.885,133.985 126.1,135.2 126.1,138.786 128.014,140.7 137.167,140.7 137.63,141.163 137.63,141.213 138.5,142.083 v1(138.5,142.6)
  other v1: 134.9,117.525 135.9,117.525 136.9,117.525 135.4,118 136.4,118 137.4,118 134.9,118.475 135.9,118.475 136.9,118.475 135.4,118.95 136.4,118.95 137.4,118.95 134.9,119.425 135.9,119.425 136.9,119.425 135.4,119.9 136.4,119.9 137.4,119.9 134.9,120.375 135.9,120.375 136.9,120.375 135.4,120.85 136.4,120.85 137.4,120.85 134.9,121.325 135.9,121.325 136.9,121.325 140.4,142.6 141.35,142.6 142.3,142.6 145.8,142.6 147.7,142.6 148.65,142.6 149.6,142.6 153.1,142.6 155,142.6 155.95,142.6 156.9,142.6 138.975,143.1 140.875,143.1 141.825,143.1 142.775,143.1 146.275,143.1 148.175,143.1 149.125,143.1 150.075,143.1 153.575,143.1 155.475,143.1 156.425,143.1 157.375,143.1 138.5,143.6 140.4,143.6 141.35,143.6 142.3,143.6 145.8,143.6 147.7,143.6 148.65,143.6 149.6,143.6 153.1,143.6 155,143.6 155.95,143.6 156.9,143.6 138.975,144.1 140.875,144.1 141.825,144.1 142.775,144.1 146.275,144.1 148.175,144.1 149.125,144.1 150.075,144.1 153.575,144.1 155.475,144.1 156.425,144.1 157.375,144.1 138.5,144.6 139.5,144.6 140.4,144.6 141.35,144.6 142.3,144.6 145.8,144.6 146.8,144.6 147.7,144.6 148.65,144.6 149.6,144.6 153.1,144.6 154.1,144.6 155,144.6 155.95,144.6 156.9,144.6
NetQ4_1: Q4.1 R3.2 | length 30.3
  Top Layer w0.254: R3.2@125.6,126 126.5,126 127.413,126.913 127.413,128.731 127.981,129.3 138.106,129.3 138.944,130.137 151.224,130.137 151.6,130.514 Q4.1@151.6,131.9
NetQ5_1: Q5.1 R5.2 | length 35.4
  Top Layer w0.254: R5.2@125.591,131.445 126.352,131.445 127.014,132.108 127.014,138.408 128.321,139.714 137.582,139.714 139.274,141.406 139.274,141.436 143.458,141.436 143.821,141.8 151.5,141.8
  Top Layer w0.305: 151.5,141.8 151.58,141.88 Q5.1@151.58,143.25
NetQ6_1: Q6.1 R7.2 | length 38.7
  Top Layer w0.254: R7.2@125.972,123.952 127.87,125.85 127.87,128.542 128.063,128.736 138.189,128.736 139.133,129.68 158.28,129.68 158.9,130.3 Q6.1@158.9,131.9
NetQ7_1: Q7.1 R9.2 | length 45.3
  Top Layer w0.254: R9.2@125.6,129.5 125.6,130 125.6,130.047 127.6,132.047 127.6,138.347 128.511,139.257 137.889,139.257 138.147,139 v2(138.5,139) ; v2(158.9,141.5) Q7.1@158.9,143.23
  Top Layer w0.305: Q7.1@158.88,143.25 Q7.1@158.9,143.23
  Bottom Layer w0.254: v2(138.5,139) 138.5,140.667 138.963,141.13 145.637,141.13 145.667,141.1 158.5,141.1 v2(158.9,141.5)
NetQ9_1: Q9.1 R15.2 | length 21.8
  Top Layer w0.254: R15.2@126,105.1 126.4,105.1 127.9,103.6 127.9,102.033 129.033,100.9 136.9,100.9 v2(138.7,102.7) ; v2(143.7,102.7) Q9.1@144.46,102.7
  Bottom Layer w0.254: v2@138.8,102.7 v2(143.7,102.7)
NetQ10_1: Q10.1 R16.2 | length 21.1
  Top Layer w0.254: R16.2@125.972,110.363 R16.2@125.984,110.363 ; R16.2@125.984,110.236 R16.2@125.984,110.363 ; R16.2@125.984,110.49 R16.2@125.984,110.363 ; Q10.1@144.48,114.15 144.48,113.913 143.437,112.87 138.323,112.87 137.887,112.434 137.887,111.274 137.371,110.757 127.498,110.757 127.103,110.363 R16.2@125.984,110.363
NetQ10_3: Q10.3 Q12.3 Q14.3 R26.2 R27.2 U3.38 | length 44.7
  Top Layer w0.254: U3.38@117.324,110.501 117.344,110.521 117.344,111.563 117.537,111.756 118.111,111.756 118.304,111.563 118.304,111.315 118.748,110.871 119.38,110.871 120.309,111.8 123.2,111.8 123.748,111.252 137.219,111.252 137.43,111.463 137.43,113.23 137.7,113.5 v1(138.7,113.5) ; R26.2@117.602,93.611 117.602,93.726 118.872,94.996 121.285,94.996 122.301,93.98 125.82,93.98 128.4,91.4 129.7,91.4 132,89.1 R27.2@133.6,89.1
  other v1: 135.25,88.575 136.25,88.575 137.25,88.575 134.75,89.05 135.75,89.05 136.75,89.05 135.25,89.525 136.25,89.525 137.25,89.525 134.75,90 135.7,90 136.75,90 135.25,90.475 136.25,90.475 137.25,90.475 134.75,90.95 135.75,90.95 136.75,90.95 135.25,91.425 136.25,91.425 137.25,91.425 134.75,91.9 135.75,91.9 136.75,91.9 140.6,113.5 141.55,113.5 142.5,113.5 145.98,113.55 147.88,113.55 148.83,113.55 149.78,113.55 153.18,113.55 155.08,113.55 156.03,113.55 156.98,113.55 139.175,114 141.075,114 142.025,114 142.975,114 146.455,114.05 148.355,114.05 149.305,114.05 150.255,114.05 153.655,114.05 155.555,114.05 156.505,114.05 157.455,114.05 138.7,114.5 140.6,114.5 141.55,114.5 142.5,114.5 145.98,114.55 147.88,114.55 148.83,114.55 149.78,114.55 153.18,114.55 155.08,114.55 156.03,114.55 156.98,114.55 139.175,115 141.075,115 142.025,115 142.975,115 146.455,115.05 148.355,115.05 149.305,115.05 150.255,115.05 153.655,115.05 155.555,115.05 156.505,115.05 157.455,115.05 138.7,115.5 139.7,115.5 140.6,115.5 141.55,115.5 142.5,115.5 145.98,115.55 146.98,115.55 147.88,115.55 148.83,115.55 149.78,115.55 153.18,115.55 154.18,115.55 155.08,115.55 156.03,115.55 156.98,115.55
NetQ11_1: Q11.1 R17.2 | length 29.8
  Top Layer w0.254: R17.2@126,103.1 126.3,103.1 126.8,102.6 126.8,101.5 128.5,99.8 137.966,99.8 138.249,100.083 138.249,100.096 139.091,100.937 151.38,100.937 151.76,101.317 Q11.1@151.76,102.7
NetQ12_1: Q12.1 R19.2 | length 28.9
  Top Layer w0.254: R19.2@125.972,108.585 126.485,108.585 128.1,110.2 137.46,110.2 138.345,111.084 138.345,112.245 138.513,112.413 143.626,112.413 144.014,112.8 150.597,112.8 151.76,113.963 Q12.1@151.76,114.2
NetQ13_1: Q13.1 R21.2 | length 36.4
  Top Layer w0.254: R21.2@125.972,101.346 128.018,99.3 138.113,99.3 138.706,99.893 138.706,99.906 139.28,100.48 158.68,100.48 158.96,100.76 Q13.1@158.96,102.7
NetQ14_1: Q14.1 R23.2 | length 38.2
  Top Layer w0.254: R23.2@125.972,106.8 126.9,106.8 129,108.9 v2(138.7,108.9) ; v2(145.7,111.7) 146.3,112.3 158.2,112.3 158.98,113.08 Q14.1@158.98,114.35
  Bottom Layer w0.254: v2(138.7,108.9) 138.9,109.1 138.9,111.4 139.2,111.7 v2(145.7,111.7)
NetQE1_9: QE1.9 R60.2 | length 2.4
  Top Layer w0.406: R60.2@85.586,134.112 85.598,134.1 QE1.9@85.598,131.699
NetQE1_10: QE1.10 R60.1 | length 2.8
  Top Layer w0.406: QE1.10@83.058,131.699 83.058,133.084 R60.1@84.086,134.112
NetQE2_9: QE2.9 R61.2 | length 4.3
  Top Layer w0.254: R61.2@84.645,114.49 85.344,113.792 85.344,110.871 QE2.9@85.598,110.617
NetQE2_10: QE2.10 R61.1 | length 2.9
  Top Layer w0.254: QE2.10@83.058,110.617 84.455,112.014 R61.1@84.455,112.966
NetR1_1: R1.1 U1.32 | length 6.4
  Top Layer w0.203: U1.32@119.162,129.528 U1.32@119.182,129.548
  Top Layer w0.254: U1.32@119.162,129.528 121.028,129.528 v2(121.3,129.8) ; v2(123.6,127.7) R1.1@124.1,127.7
  Bottom Layer w0.254: v2(121.3,129.8) 122.2,129.8 123.6,128.4 v2(123.6,127.7)
NetR2_1: R2.1 U1.36 | length 5.6
  Top Layer w0.254: U1.36@119.209,131.528 119.229,131.508 120.075,131.508 120.193,131.626 120.193,131.643 120.993,132.443 121.643,132.443 122.296,133.096 R2.1@124.091,133.096
NetR3_1: R3.1 U1.29 | length 5.4
  Top Layer w0.254: U1.29@119.162,128.028 119.182,128.008 120.701,128.008 121.201,127.508 121.539,127.508 v2@121.539,127.635
  Bottom Layer w0.254: v2@121.544,127.503 v2@123.423,125.624
  other v2: 123.5,125.7 121.432,127.528
NetR4_2: R4.2 U1.18 | length 3
  Top Layer w0.254: R4.2@114.046,121.654 114.046,122.309 114.621,122.884 114.621,122.885 114.812,123.076 U1.18@114.812,124.337
NetR5_1: R5.1 U1.35 | length 5.5
  Top Layer w0.254: U1.35@119.182,131.048 120.261,131.048 120.65,131.437 120.65,131.454 121.182,131.986 123.015,131.986 123.208,131.793 123.223,131.793 123.571,131.445 R5.1@124.091,131.445
NetR6_2: R6.2 U1.39 | length 4.4
  Top Layer w0.254: U1.39@116.832,132.873 116.832,134.061 117.336,134.565 118.563,134.565 R6.2@119.438,135.44
NetR7_1: R7.1 U1.26 | length 6.9
  Top Layer w0.254: U1.26@119.162,126.528 119.182,126.508 120.221,126.508 121.285,125.444 v6(121.285,124.968) ; v6(123.444,124.46) 123.571,124.333 123.571,123.952 R7.1@124.472,123.952
  Bottom Layer w0.254: v6(121.285,124.968) 121.793,124.46 v6(123.444,124.46)
NetR8_1: R8.1 R10.2 U1.23 | length 4.2
  Top Layer w0.203: R10.2@118.364,122.67 118.364,122.682 119.368,122.682 R8.1@119.38,122.67
  Top Layer w0.254: U1.23@117.312,124.678 117.312,123.661 117.627,123.346 117.827,123.346 118.3,122.872 117.983,122.555 R10.2@118.364,122.555
NetR9_1: R9.1 U1.34 | length 5.1
  Top Layer w0.254: U1.34@119.162,130.528 120.388,130.528 v2@120.999,131.14
  Bottom Layer w0.254: v2(121.285,131.191) 121.909,131.191 v2(123.6,129.5)
NetR14_1: R14.1 U4.14 | length 16.1
  Top Layer w0.254: v2(100.33,120.396) 100.952,121.018 U4.14@100.952,122.49 ; v2(109.982,118.491) 110.109,118.618 112.268,118.618 112.649,118.237 R14.1@113.042,118.237
  Bottom Layer w0.254: v2(100.33,120.396) 100.33,120.269 102.108,118.491 v2(109.982,118.491)
NetR15_1: R15.1 U3.32 | length 7.4
  Top Layer w0.254: U3.32@119.194,107.156 119.233,107.196 122.904,107.196 v2(123,107.1)
  Bottom Layer w0.254: v2(123,107.1) 123,106.4 123.6,105.8 124,105.8 124.5,105.3 v2(124.5,104.4)
NetR16_1: R16.1 U3.36 | length 7.3
  Top Layer w0.254: U3.36@119.174,109.176 119.962,109.176 119.962,110.509 120.753,111.3 123.054,111.3 123.864,110.49 124.333,110.49 124.46,110.363 R16.1@124.472,110.363
NetR17_1: R17.1 U3.29 | length 6.9
  Top Layer w0.254: U3.29@119.174,105.676 121.158,105.676 v2(121.297,105.537) ; v2(123.571,105.029) 123.571,103.929 R17.1@124.4,103.1
  Bottom Layer w0.254: v2(121.297,105.537) 121.805,105.029 v2(123.571,105.029)
NetR18_2: R18.2 U3.18 | length 3.7
  Top Layer w0.254: R18.2@114.312,98.794 114.312,100.18 114.824,100.692 U3.18@114.824,102.326
NetR19_1: R19.1 U3.35 | length 8.3
  Top Layer w0.254: U3.35@119.174,108.676 119.194,108.696 120.273,108.696 120.554,108.977 120.554,110.454 120.8,110.7 122.9,110.7 123.792,109.808 123.792,109.776 123.985,109.583 124.017,109.583 124.472,109.128 R19.1@124.472,108.458
NetR20_2: R20.2 U3.39 | length 2.3
  Top Layer w0.254: U3.39@116.824,110.526 116.824,111.859 117.233,112.268 R20.2@117.233,112.649
NetR21_1: R21.1 U3.26 | length 7.2
  Top Layer w0.254: U3.26@119.174,104.176 120.191,104.176 121.158,103.209 v2(121.158,102.743) ; v2@123.444,101.219 v2(123.571,101.346) 124.218,101.346 R21.1@124.472,101.092
  Bottom Layer w0.254: v2(121.158,102.743) 122.428,102.743 123.571,101.6 v2(123.571,101.346) ; v2@123.438,101.225 123.45,101.225 v2@123.456,101.219
NetR22_1: R22.1 R24.2 U3.23 | length 4.3
  Top Layer w0.254: U3.23@117.324,102.351 117.344,102.331 117.344,101.289 118.376,100.257 118.376,100.076 119.392,100.076 R22.1@120.015,100.076
NetR23_1: R23.1 U3.34 | length 7.4
  Top Layer w0.254: U3.34@119.174,108.176 120.4,108.176 v2@121.412,109.188
  Bottom Layer w0.254: v2(121.3,109.3) 123.3,109.3 123.9,108.7 v2(123.9,106.8)
NetR28_1: R28.1 U4.2 | length 20.5
  Top Layer w0.254: U4.2@104.202,113.64 104.927,113.64 105.41,113.157 105.41,112.395 104.267,111.252 v2(104.267,110.49) ; v2(106.934,104.14) 107.188,103.886 107.188,103.378 107.188,98.806 107.442,98.552 108.186,98.552 R28.1@109.474,97.264
  Bottom Layer w0.254: v2@104.267,110.363 v2@104.331,110.426 ; v2(104.267,110.49) v2@104.331,110.426 ; v2(106.934,104.14) 106.426,104.648 106.426,108.331 v2@104.331,110.426